# Altium PCB PCBFOC.PcbDoc
Units mm, origin at the board's own origin, x right, y up, seen from the top; angles counter-clockwise.
Board outline 65 x 70 mm, 4 copper layers (Top Layer, Layer 1, Layer 2, Bottom Layer), stack 0.603 mm thick; 46 components, 50 nets, 192 pads, 195 vias.
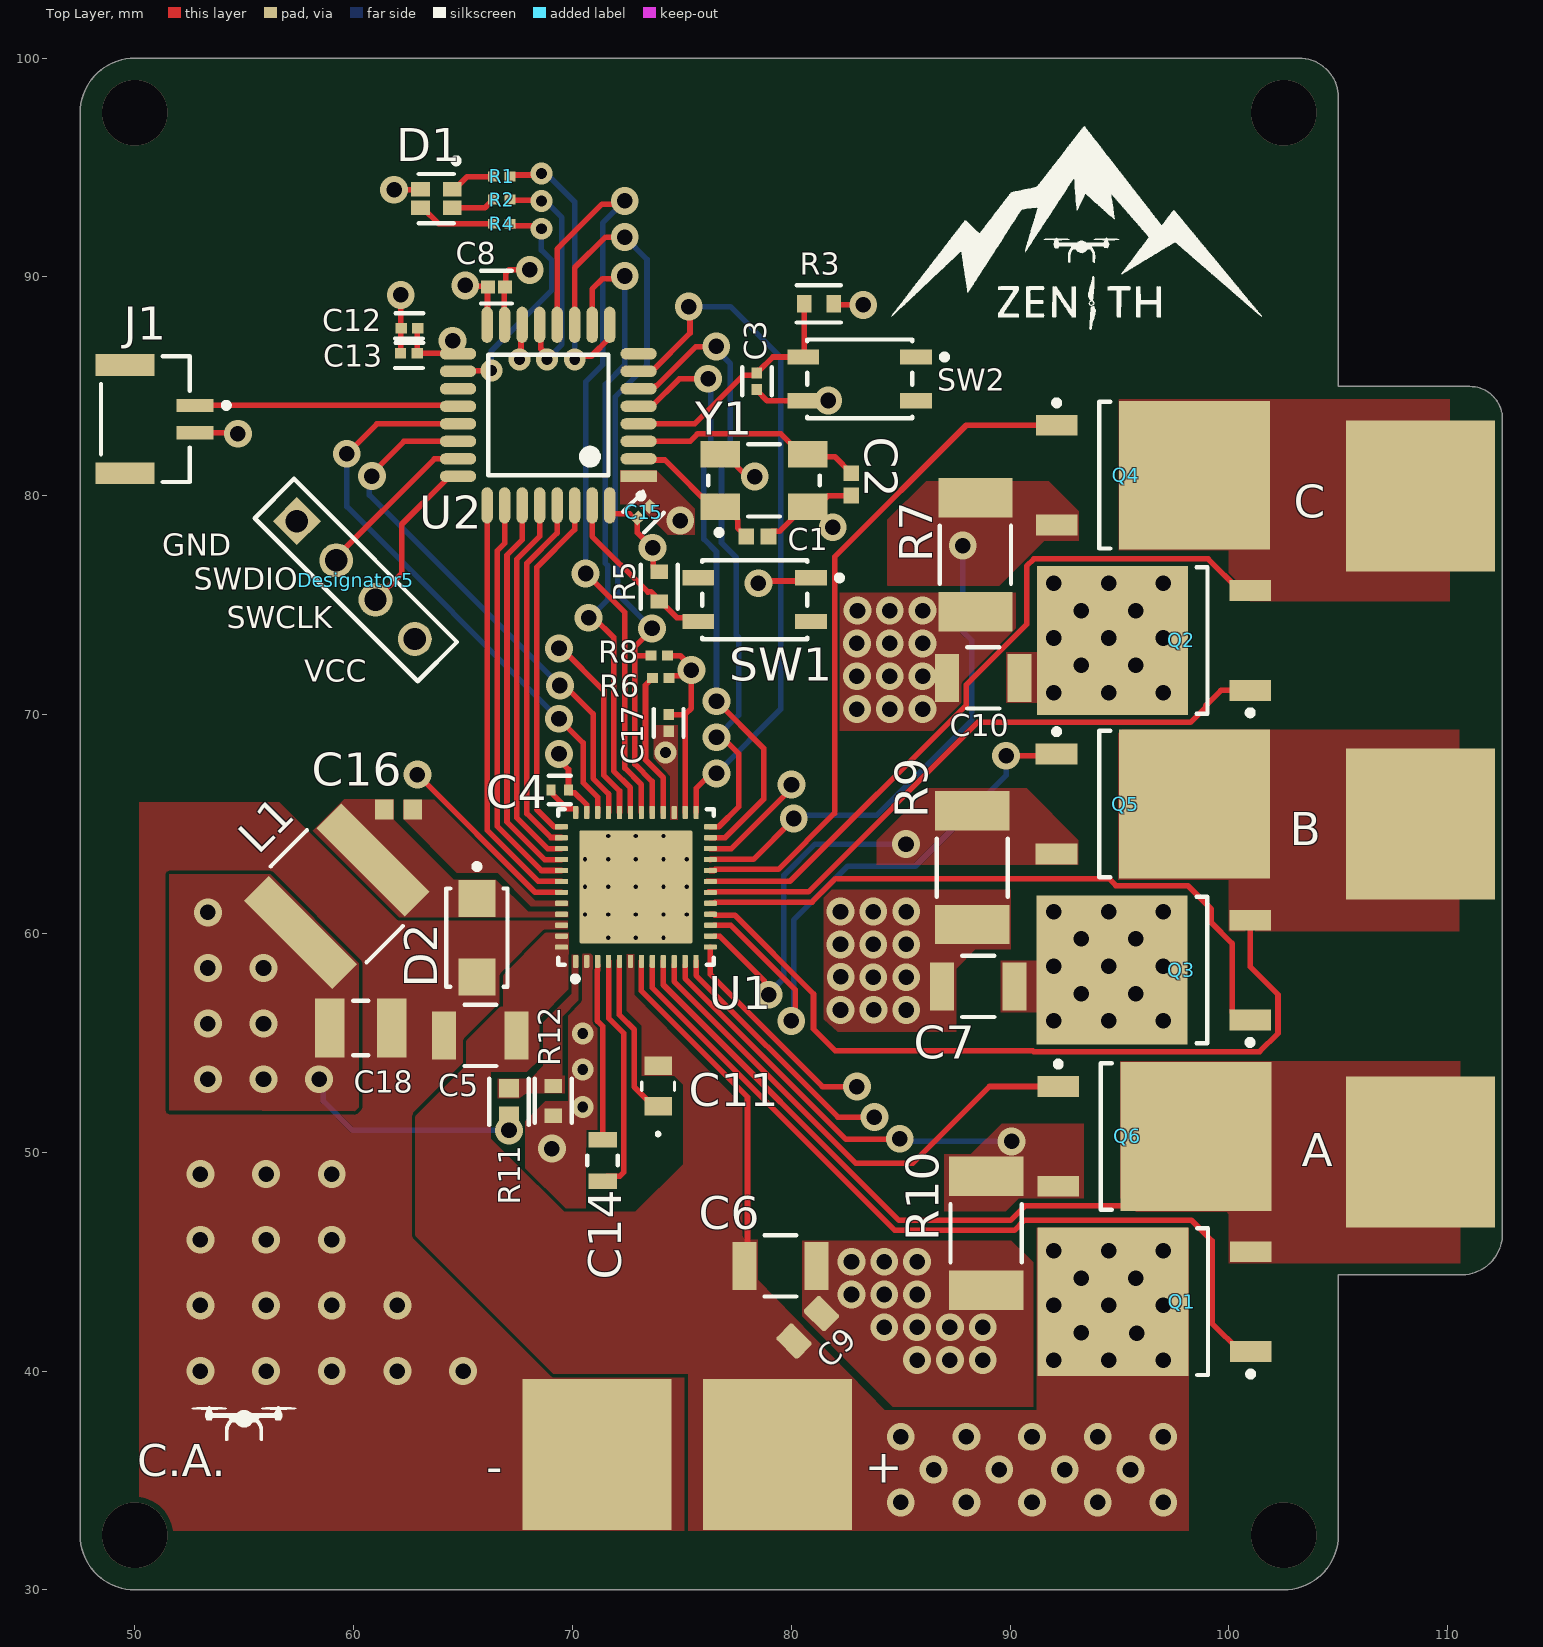
[diagram p0: Top Layer view]
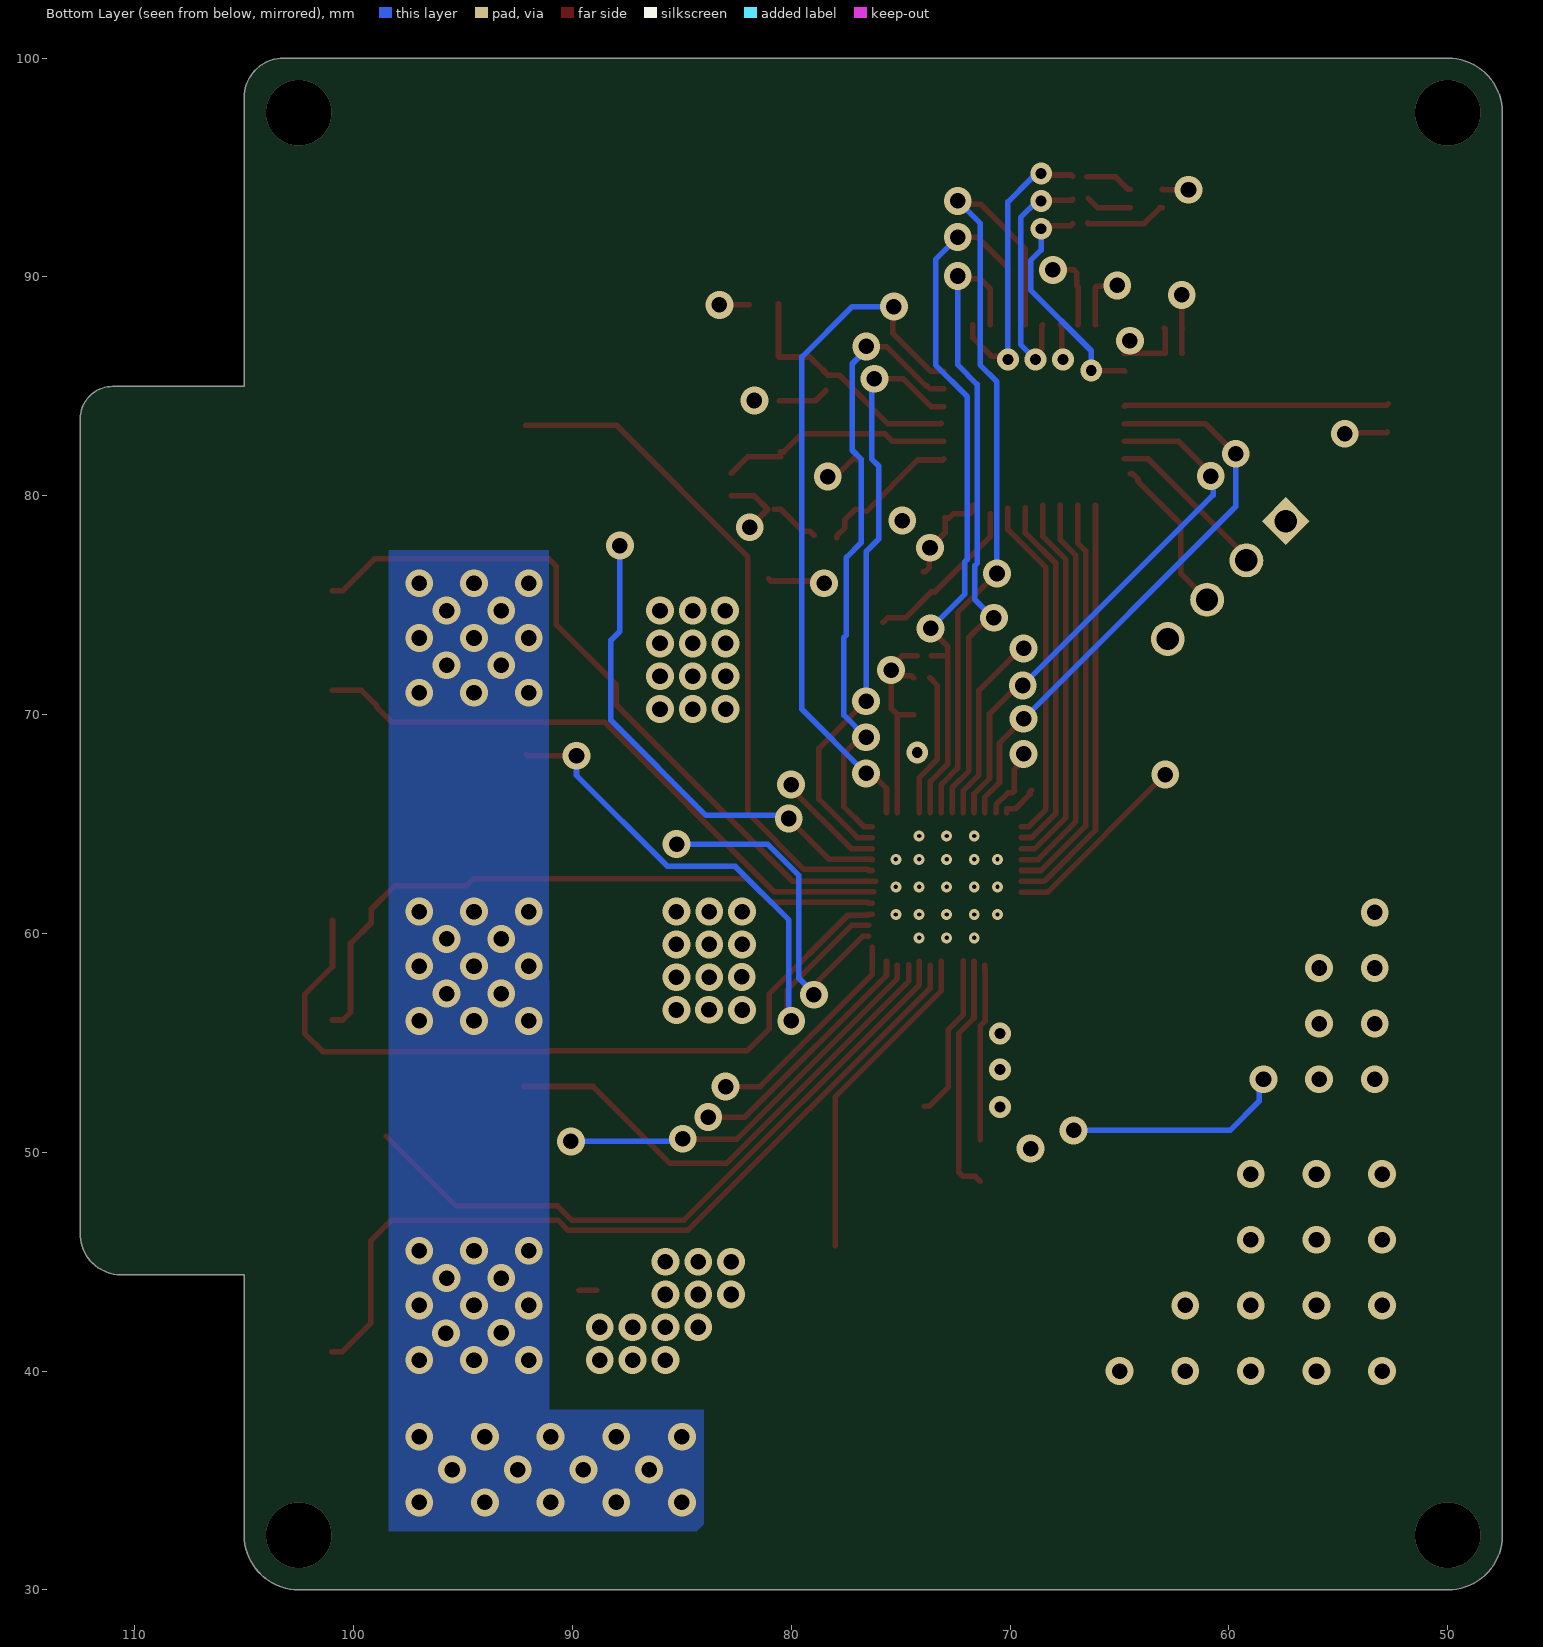
[diagram p1: Bottom Layer view, seen from below]
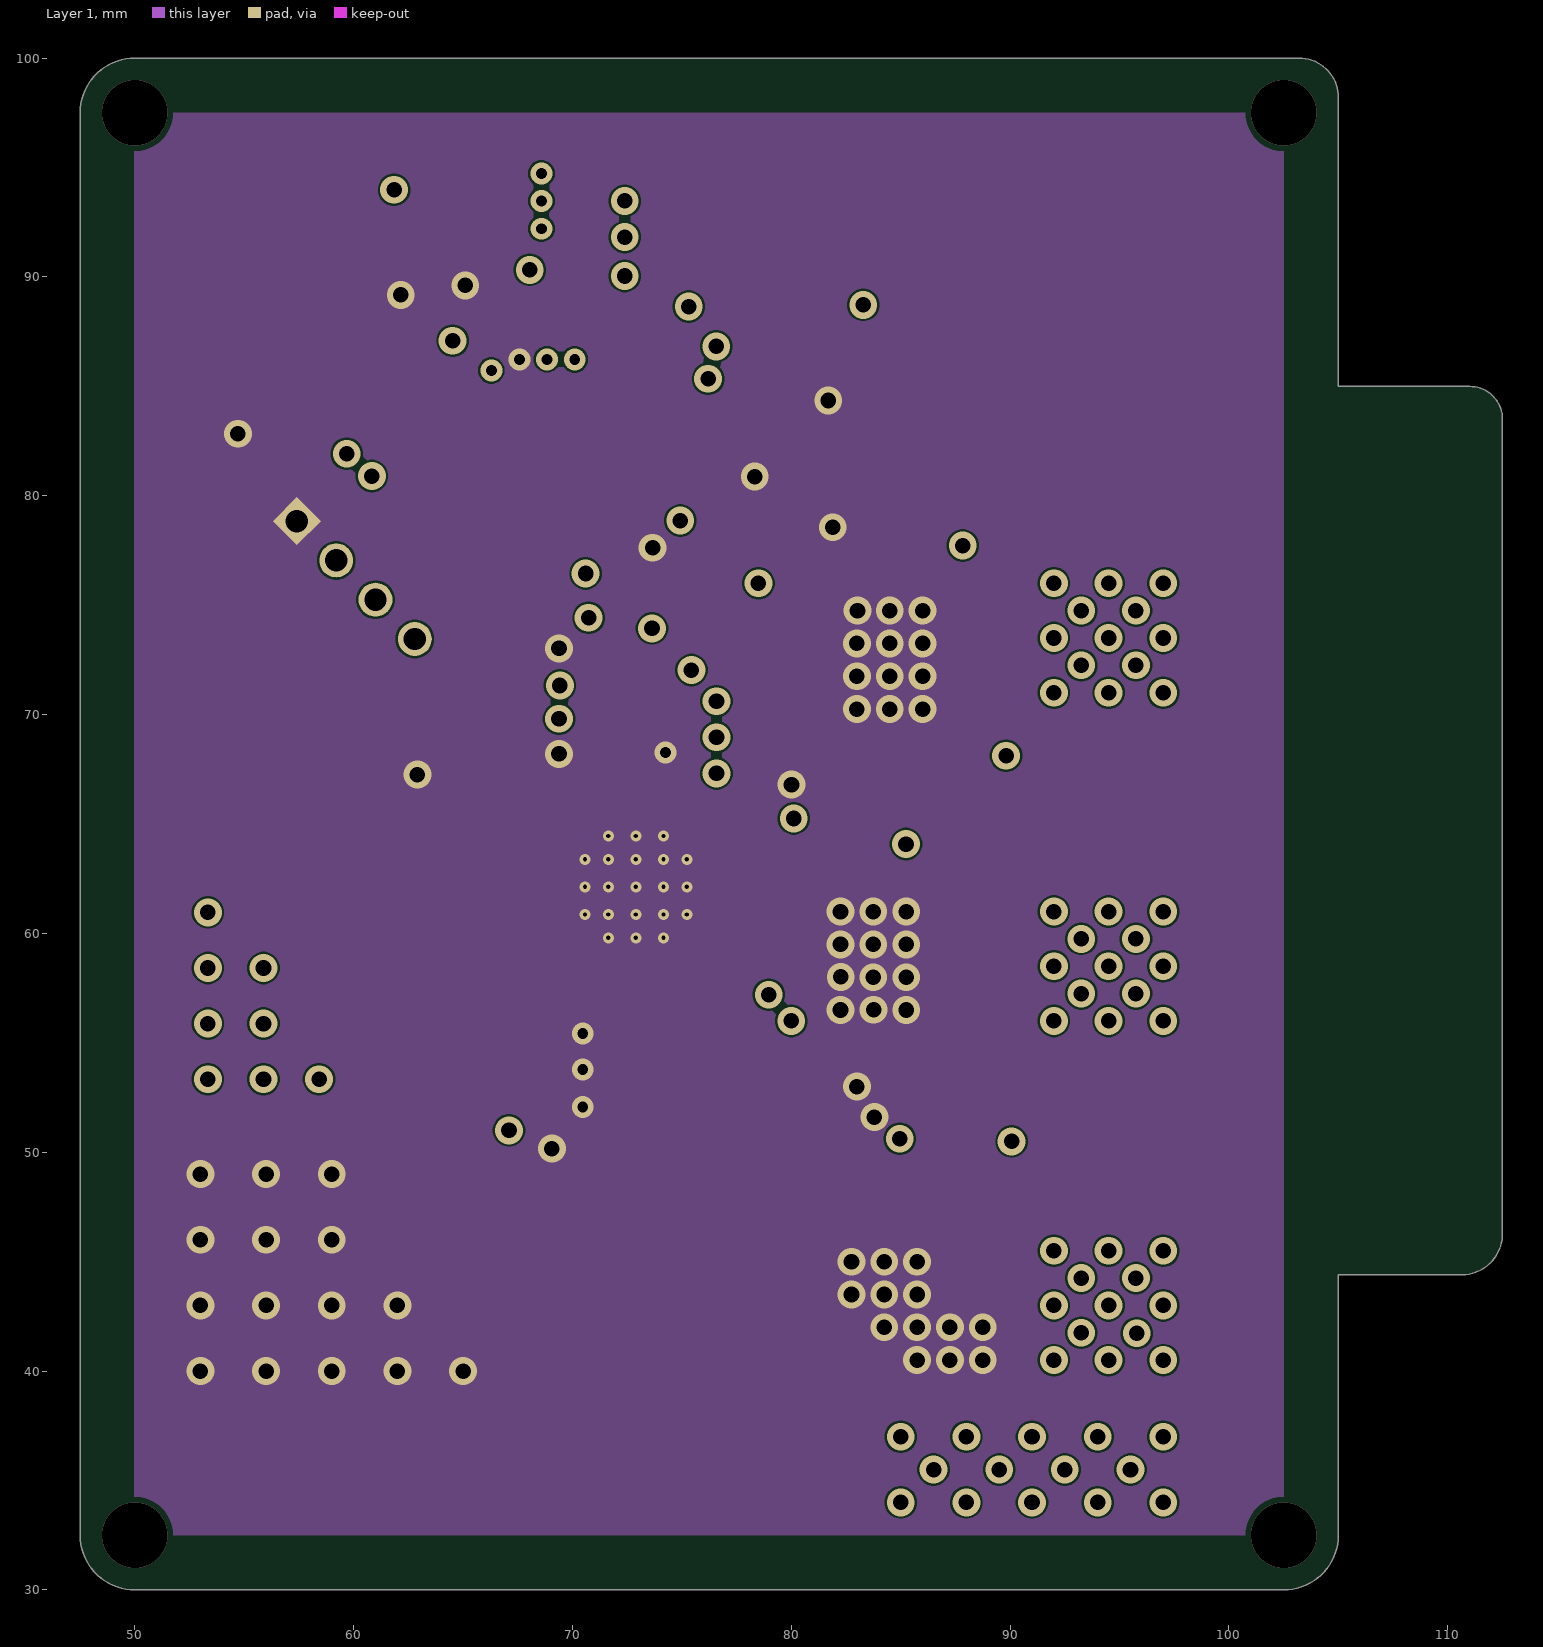
[diagram p2: Layer 1]
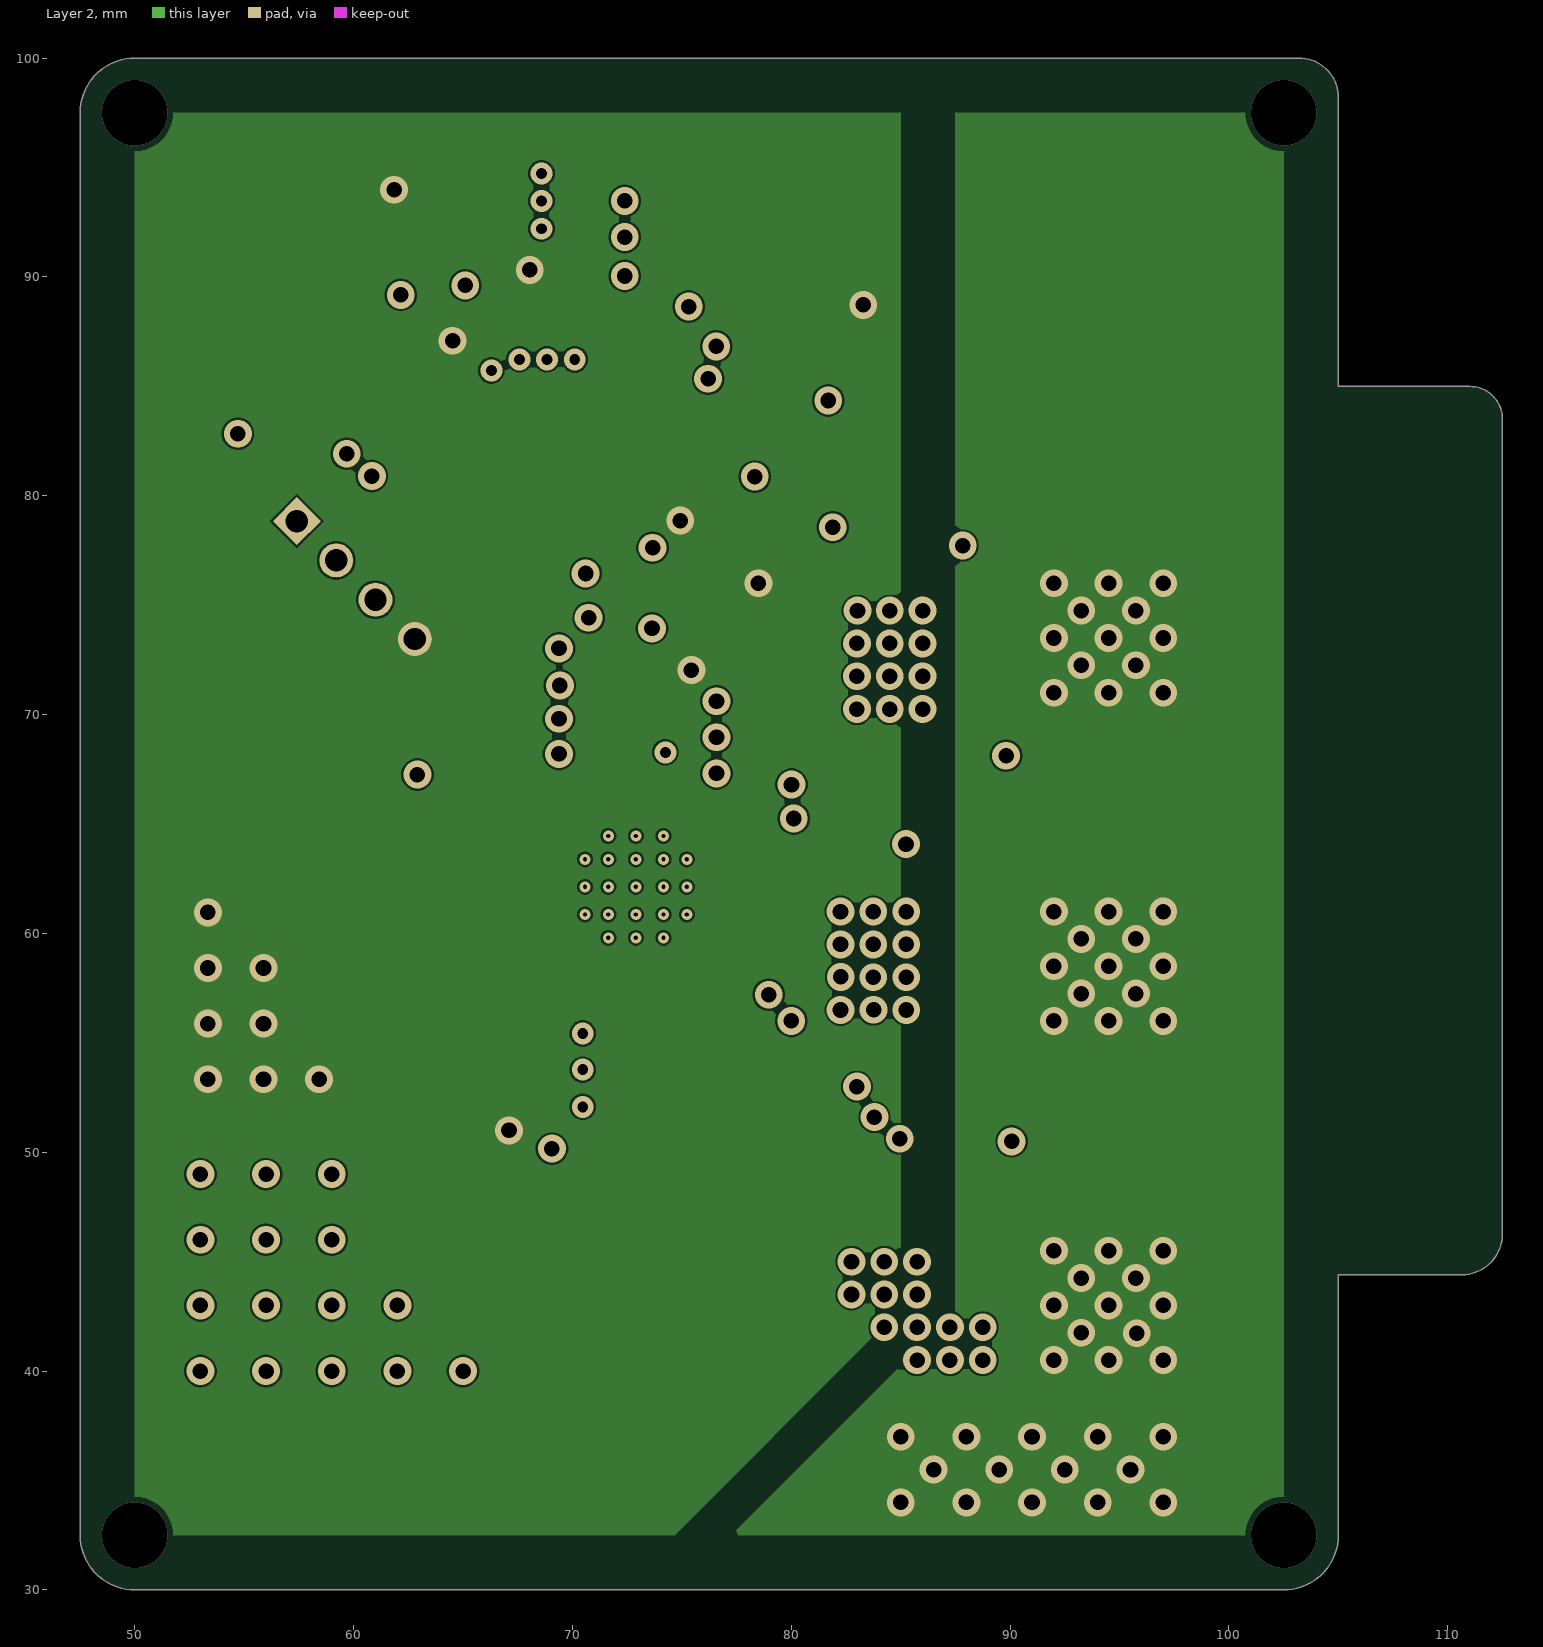
[diagram p3: Layer 2]
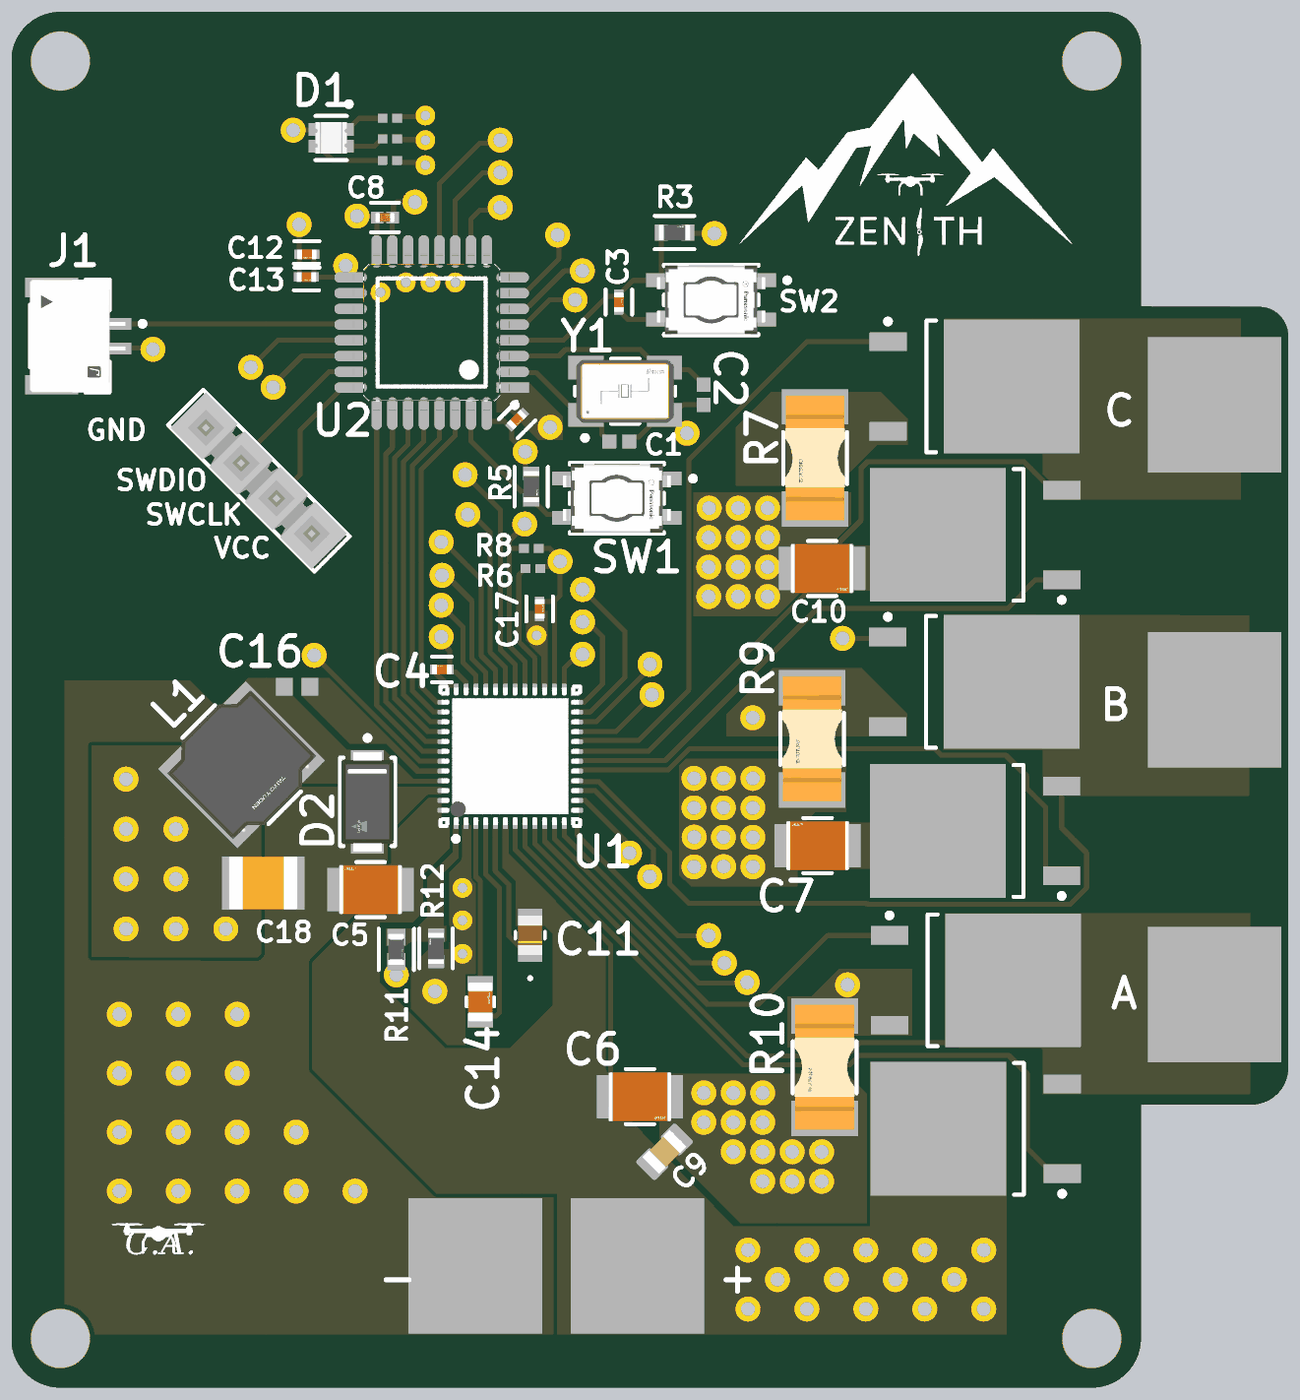
[diagram p4: 3D render of the assembled board from above, using the file's embedded part models]

## Layer stack, top to bottom
Top Solder: solder mask 0.0102, Solder Resist, Dk 3.5
Top Layer: signal copper 0.0356
Dielectric 2: prepreg 0.0711, PP-006, Dk 4.1
Layer 1: signal copper 0.035
Dielectric 1: dielectric 0.32, FR-4, Dk 4.8
Layer 2: signal copper 0.035
Dielectric 3: prepreg 0.0711, PP-006, Dk 4.1
Bottom Layer: signal copper 0.0356
Bottom Solder: solder mask 0.0102, Solder Resist, Dk 3.5

## Board outline
47.5,32.5 ccw(c50,32.5) 50,30 102.5,30 ccw(c102.5,32.5) 105,32.5 105,44.4 110.669,44.402 ccw(c110.629,46.271) 112.498,46.311 112.5,83.5 ccw(c111.005,83.5) 111.005,84.995 105,85.014 105,98.2 ccw(c103.2,98.2) 103.2,100 50,100 ccw(c50,97.5) 47.5,97.5

## Design rules (kind name [scope] priority, off if disabled: settings)
Clearance [All] p1: gap=0.254 ignorepadtopadclearanceinfootprint=FALSE except(0.1: Arc-Fill Arc-Poly Arc-Region Track-Fill Track-Poly Track-Region SMDPad-Fill SMDPad-Poly SMDPad-Region THPad-Fill THPad-Poly THPad-Region Via-Fill Via-Poly Via-Region; 0.15: Fill-Fill Fill-Poly Fill-Region Poly-Poly Poly-Region Region-Region; 0.2: Arc-Arc Arc-Track Arc-SMDPad Track-Track Track-SMDPad SMDPad-SMDPad)
ComponentClearance [All] p1: gap=0.05 collisioncheckmode=3 verticalgap=0.254 showdistances=FALSE
PolygonConnect [All] p1: connectstyle=Direct reliefconductorwidth=0.254 reliefentries=4 polygonreliefangle="90 Angle" airgapwidth=0.254
RoutingVias [All] p1: holewidth=0.711 width=1.27 viastyle="Through Hole" minholewidth=0.711 minwidth=1.27 maxholewidth=0.711 maxwidth=1.27
SolderMaskExpansion [All] p1: expansion=0 istentingtop=FALSE
SupplyNets "Schematic Supply Nets_1" [InNet('GND')] p1: voltage=0.000
SupplyNets "Schematic Supply Nets_2" [InNet('VCC')] p2: voltage=0.000
Width [All] p1: maxlimit=0.254 minlimit=0.254 preferedwidth=0.254
29 further rules are at their usual default settings.

## Components (designator, comment, footprint, x,y, rotation, side; value= is the part's Value field where it differs from the comment)
C1 "CC0402JRNPO9BN220" CAPC1005X55X25ML05T05 78.45,78.137 r180 top
C2 "CC0402JRNPO9BN220" CAPC1005X55X25ML05T05 82.744,80.517 r90 top
C3 "CL05B104KP5VPNC" FP-CL93-IPC_C 78.426,85.233 r90 top
C4 "GRM155R70J105KA12D" FP-GRM155-0_05-MFG 69.418,66.548 r180 top
C5 "C3225X7R1N106K250AC" FP-C3225-250-0_4-MFG 65.789,55.339 r180 top
C6 "C3225X7R1N106K250AC" FP-C3225-250-0_4-MFG 79.502,44.806 r0 top
C7 "C3225X7R1N106K250AC" FP-C3225-250-0_4-MFG 88.544,57.582 r180 top
C8 "GRM155R60J106ME05D" FP-GRM155-0_2-IPC_C 66.525,89.537 r0 top
C9 "CL21B104KCFNNNE" CAPC2012X135N 80.75,42 r225 top
C10 "C3225X7R1N106K250AC" FP-C3225-250-0_4-MFG 88.773,71.679 r0 top
C11 "CL21B105KBFNNNE" CAP_CL21_SAM 73.914,53.02 r90 top
C12 "CL05B104KP5VPNC" FP-CL93-IPC_C 62.55,87.662 r0 top
C13 "CL05B104KP5VPNC" FP-CL93-IPC_C 62.525,86.512 r0 top
C14 "GCM21BR72A473KA37L" FP-GCM21B-0_15-MFG 71.375,49.625 r90 top
C15 "CL05B104KP5VPNC" FP-CL93-IPC_C 73.25,79.25 r45 top
C16 "C0603C105K4RACTU" CAPC1608X90X35LL15T15 62.045,65.661 r0 top
C17 "CL05B104KP5NNNC" FP-CL17-IPC_C 74.397,69.621 r90 top
C18 "CL32B476MPJNNNE" CAPC3225X27N 60.325,55.677 r180 top
D1 "LTST-C19HE1WT" FP-LTST-C19HE1WT-MFG 63.782,93.581 r270 top
D2 "SS16HE3_B/I" FP-95400-MFG 65.634,59.805 r270 top
Designator5 "Comment" SMTC-TSW-104-08-X-S 57.408,78.842 r315 top
J1 "SM02B-GHS-TB(LF)(SN)" FP-SM02B-GHS-TB_LF_SN-MFG 50.481,83.505 r270 top
L1 "NRS6045T220MMGK" FP-NR6045-MFG 59.228,61.698 r225 top
Q1 "*" DPAK228P970X238-3N 96.593,43.17 r180 top
Q2 "MDDG10R08D" DPAK228P970X238-3N 96.568,73.387 r180 top
Q3 "MDDG10R08D" DPAK228P970X238-3N 96.565,58.324 r180 top
Q4 "MDDG10R08D" DPAK228P970X238-3N 96.528,80.941 r0 top
Q5 "MDDG10R08D" DPAK228P970X238-3N 96.52,65.913 r0 top
Q6 "MDDG10R08D" DPAK228P970X238-3N 96.6,50.724 r0 top
R1 "RC0402FR-07330RL" RESC1005X40X25LL05T10 66.775,94.591 r0 top
R2 "RC0402FR-07330RL" RESC1005X40X25LL05T10 66.775,93.537 r0 top
R3 "RC0603FR-0710KL" FP-RC0603-0_55-IPC_C 81.261,88.77 r0 top
R4 "RC0402FR-07330RL" RESC1005X40X25LL05T10 66.775,92.432 r0 top
R5 "RC0603FR-0710KL" FP-RC0603-0_55-IPC_C 73.965,75.844 r270 top
R6 "RC0402FR-0710KL" RESC1005X40X25LL05T10 74.041,71.679 r0 top
R7 "CSS2H-2512R-1L00F" FP-CSS2H-2512R-1L00F-MFG 88.417,77.301 r90 top
R8 "RC0402FR-0710KL" RESC1005X40X25LL05T10 73.971,72.695 r0 top
R9 "CSS2H-2512R-1L00F" FP-CSS2H-2512R-1L00F-MFG 88.268,63.008 r90 top
R10 "CSS2H-2512R-1L00F" FP-CSS2H-2512R-1L00F-MFG 88.9,46.3 r90 top
R11 "ERA-3AEB303V" FP-ERA3A-IPC_C 67.1,52.3 r270 top
R12 "RC0603FR-0710KL" FP-RC0603-0_55-IPC_C 69.125,52.35 r90 top
SW1 "EVQ-P2202M" FP-EVQ-P2202M-MFG 78.325,75.25 r270 top
SW2 "EVQ-P2202M" FP-EVQ-P2202M-MFG 83.125,85.341 r270 top
U1 "DRV8323RSRGZR" FP-RGZ0048A-MFG 72.9,62.125 r90 top
U2 "STM32G431KBT6" FP-LQFP32-5V-IPC_B 68.9,83.687 r180 top
Y1 "ABM3B-8.000MHZ-B2-T" FP-ABM3B-MFG 78.75,80.7 r0 top

## Footprints (in the part's own frame and the unit in brackets; to place one, negate y for a bottom-side part, rotate by r counter-clockwise, add the part's x,y. Pads: shape width x height; smd on the part's side, far side on the other; paste and mask are expansions set on the pad)
CAP_CL21_SAM [mm]
  rect 0.85x1.25 smd paste+0 mask+0: 1(-0.925,0) 2(0.925,0)
  silkscreen extent -2.26,-0.75 0.19,0.75, body extent -1,-0.63 1,0.63, height 1.35
CAPC1005X55X25ML05T05 [mm] "Chip Capacitor, 2-Leads, Body 1.00x0.50mm, IPC Low Density"
  rect 0.72x0.72 smd: 1(-0.51,0) 2(0.51,0)
  body extent -0.53,-0.28 0.53,0.27, height 0.55
CAPC1608X90X35LL15T15 [mm] "Chip Capacitor, 2-Leads, Body 1.60x0.81mm, IPC High Density"
  rect 0.85x0.9 smd: 1(-0.65,0) 2(0.65,0)
  body extent -0.88,-0.48 0.87,0.48, height 0.9
CAPC2012X135N [mm]
  rrect25% 1.05x1.38 smd: 1(-0.888,0) 2(0.888,0)
  body extent -1,-0.62 1,0.62, height 1.35
CAPC3225X27N [mm] "Chip Capacitor, 2-Leads, Body 3.20x2.50mm, IPC Medium Density"
  rect 1.35x2.7 smd: 1(-1.425,0) 2(1.425,0)
  silkscreen extent -0.35,-1.25 0.35,1.25, body extent -1.75,-1.35 1.75,1.35, height 2.7
DPAK228P970X238-3N [mm] "D-PAK, 3-Pads, Body 6.20x6.72mm (max), IPC Medium Density"
  rect 6.9x6.8 smd: D(1.9,0)
  rect 1.9x0.95 smd: G(-4.4,2.28) S(-4.4,-2.28)
  silkscreen extent -4.52,-3.35 -1.95,3.43, body extent -2.45,-3.35 3.75,3.35, height 2.38
FP-95400-MFG [mm]
  rect 1.7x1.68 smd paste+0 mask+0: 1(-1.79,0) 2(1.79,0)
  silkscreen extent -3.37,-1.4 2.25,1.4, body extent -2.74,-1.5 2.74,1.5, height 0.25
FP-ABM3B-MFG [mm]
  rect 1.8x1.2 smd paste+0 mask+0: 1(-2,-1.2) 2(2,-1.2) 3(2,1.2) 4(-2,1.2)
  silkscreen extent -2.55,-2.5 2.55,1.65, body extent -3,-1.9 3,1.9, height 0.25
FP-C3225-250-0_4-MFG [mm]
  rect 1.1x2.2 smd paste+0 mask+0: 1(-1.65,0) 2(1.65,0)
  silkscreen extent -0.72,-1.4 0.72,1.4, body extent -2.3,-1.5 2.3,1.5, height 0.25
FP-CL17-IPC_C [mm]
  rect 0.515x0.472 smd paste+0 mask+0: 1(-0.379,0) 2(0.379,0)
  silkscreen extent -0.64,-0.67 0.64,0.67, body extent -0.74,-0.38 0.74,0.38, height 0.25
FP-CL93-IPC_C [mm]
  rect 0.515x0.472 smd paste+0 mask+0: 1(-0.379,0) 2(0.379,0)
  silkscreen extent -0.64,-0.67 0.64,0.67, body extent -0.74,-0.38 0.74,0.38, height 0.25
FP-CSS2H-2512R-1L00F-MFG [mm]
  rect 1.8x3.4 smd paste+0 mask+0: 1(-2.6,0) 2(2.6,0)
  silkscreen extent -1.33,-1.63 1.33,1.63, body extent -3.6,-1.8 3.6,1.8, height 0.25
FP-ERA3A-IPC_C [mm]
  rect 0.855x0.906 smd paste+0 mask+0: 1(-0.626,0) 2(0.626,0)
  silkscreen extent -1.05,-0.9 1.05,0.9, body extent -1.15,-0.6 1.15,0.6, height 0.25
FP-EVQ-P2202M-MFG [mm]
  rect 0.7x1.45 smd paste+0 mask+0: 1(-1,2.575) 2(1,2.575) 3(-1,-2.575) 4(1,-2.575)
  silkscreen extent -1.8,-2.4 1.8,4, body extent -1.9,-3.4 1.9,3.4, height 0.25
FP-GCM21B-0_15-MFG [mm]
  rect 0.7x1.3 smd paste+0 mask+0: 1(-0.95,0) 2(0.95,0)
  silkscreen extent -0.23,-0.7 0.23,0.7, body extent -1.4,-0.8 1.4,0.8, height 0.25
FP-GRM155-0_2-IPC_C [mm]
  rect 0.628x0.606 smd paste+0 mask+0: 1(-0.389,0) 2(0.389,0)
  silkscreen extent -0.7,-0.75 0.7,0.75, body extent -0.8,-0.45 0.8,0.45, height 0.25
FP-GRM155-0_05-MFG [mm]
  rect 0.4x0.5 smd paste+0 mask+0: 1(-0.4,0) 2(0.4,0)
  silkscreen extent -0.5,-0.65 0.5,0.65, body extent -0.7,-0.38 0.7,0.38, height 0.25
FP-LQFP32-5V-IPC_B [mm]
  rect 1.655x0.526 smd paste+0 mask+0: 1(-4.125,2.8)
  rrect100% 1.655x0.526 smd paste+0 mask+0: 2(-4.125,2) 3(-4.125,1.2) 4(-4.125,0.4) 5(-4.125,-0.4) 6(-4.125,-1.2) 7(-4.125,-2) 8(-4.125,-2.8) 17(4.125,-2.8) 18(4.125,-2) 19(4.125,-1.2) 20(4.125,-0.4) 21(4.125,0.4) 22(4.125,1.2) 23(4.125,2) 24(4.125,2.8)
  rrect100% 0.526x1.655 smd paste+0 mask+0: 9(-2.8,-4.125) 10(-2,-4.125) 11(-1.2,-4.125) 12(-0.4,-4.125) 13(0.4,-4.125) 14(1.2,-4.125) 15(2,-4.125) 16(2.8,-4.125) 25(2.8,4.125) 26(2,4.125) 27(1.2,4.125) 28(0.4,4.125) 29(-0.4,4.125) 30(-1.2,4.125) 31(-2,4.125) 32(-2.8,4.125)
  silkscreen extent -4.35,-2.75 2.75,3.82, body extent -5.2,-5.2 5.2,5.2, height 0.25
FP-LTST-C19HE1WT-MFG [mm]
  rect 0.65x0.85 smd paste+0 mask+0: 1(-0.425,0.725) 2(0.425,0.725) 3(0.425,-0.725) 4(-0.425,-0.725)
  silkscreen extent -1.85,-0.8 1.12,1.03, body extent -0.95,-1.25 0.95,1.25, height 0.25
FP-NR6045-MFG [mm]
  rect 1.6x5.7 smd paste+0 mask+0: 1(-2.35,0) 2(2.35,0)
  silkscreen extent -1.17,-3.1 1.17,3.1, body extent -3.25,-3.2 3.25,3.2, height 0.25
FP-RC0603-0_55-IPC_C [mm]
  rect 0.659x0.812 smd paste+0 mask+0: 1(-0.677,0) 2(0.677,0)
  silkscreen extent -1.01,-0.85 1.01,0.85, body extent -1.11,-0.55 1.11,0.55, height 0.25
FP-RGZ0048A-MFG [mm]
  rrect42% 0.6x0.24 smd paste+0 mask+0: 1(-3.4,2.75) 2(-3.4,2.25) 3(-3.4,1.75) 4(-3.4,1.25) 5(-3.4,0.75) 6(-3.4,0.25) 7(-3.4,-0.25) 8(-3.4,-0.75) 9(-3.4,-1.25) 10(-3.4,-1.75) 11(-3.4,-2.25) 12(-3.4,-2.75) 25(3.4,-2.75) 26(3.4,-2.25) 27(3.4,-1.75) 28(3.4,-1.25) 29(3.4,-0.75) 30(3.4,-0.25) 31(3.4,0.25) 32(3.4,0.75) 33(3.4,1.25) 34(3.4,1.75) 35(3.4,2.25) 36(3.4,2.75)
  rrect42% 0.24x0.6 smd paste+0 mask+0: 13(-2.75,-3.4) 14(-2.25,-3.4) 15(-1.75,-3.4) 16(-1.25,-3.4) 17(-0.75,-3.4) 18(-0.25,-3.4) 19(0.25,-3.4) 20(0.75,-3.4) 21(1.25,-3.4) 22(1.75,-3.4) 23(2.25,-3.4) 24(2.75,-3.4) 37(2.75,3.4) 38(2.25,3.4) 39(1.75,3.4) 40(1.25,3.4) 41(0.75,3.4) 42(0.25,3.4) 43(-0.25,3.4) 44(-0.75,3.4) 45(-1.25,3.4) 46(-1.75,3.4) 47(-2.25,3.4) 48(-2.75,3.4)
  rrect2% 5.15x5.15 smd paste-1000 mask+0: 49(0,0)
  silkscreen extent -4.32,-3.55 3.55,3.55, body extent -3.8,-3.8 3.8,3.8, height 0.25
FP-SM02B-GHS-TB_LF_SN-MFG [mm]
  rect 0.6x1.7 smd paste+0 mask+0: 1(-0.625,2.275) 2(0.625,2.275)
  rect 1x2.7 smd paste+0 mask+0: 3(-2.475,-0.925) 4(2.475,-0.925)
  silkscreen extent -2.88,-2.02 2.88,3.83, body extent -3.08,-2.37 3.08,3.22, height 0.25
RESC1005X40X25LL05T10 [mm] "Chip Resistor, 2-Leads, Body 1.00x0.50mm, IPC High Density"
  rect 0.5x0.45 smd: 1(-0.375,0) 2(0.375,0)
  body extent -0.53,-0.27 0.53,0.28, height 0.4
SMTC-TSW-104-08-X-S [mm] ".025 SQ Post Terminal Strip Assembly, 1x4 Pins, Vertical, 2.54mm Pitch, Male"
  rect 1.55x1.55 hole 1.02: 1(0,0)
  round 1.55 hole 1.02: 2(2.54,0) 3(5.08,0) 4(7.62,0)
  silkscreen extent -1.46,-1.27 9.08,1.27, body extent -1.27,-1.27 8.89,1.27, height 8.38

## Part data
C1 C2: library part CMP-2100-03590-1, "Chip Capacitor, 22 pF, +/- 5%, 50 V, -55 to 125 degC, 0402 (1005 Metric), RoHS, Tape and Reel", Capacitance=22pF, Case Code (Imperial)=0402, Case Code (Metric)=1005, Dielectric=C0G, Dielectric Material=Ceramic, Insulation Resistance=100GR, Manufacturer=Yageo, Max Operating Temperature=125degC, Min Operating Temperature=-55degC, Package Description="2-Pin Surface Mount Device, Body 1 x 0.5 mm", Package Quantity=1, Temperature Coefficient=30ppm/degC, Tolerance=5%, Voltage Rating=50V, Case/Package=0402, Composition=Ceramic, Datasheet URL=http://www.yageo.com/NewPortal/yageodocoutput?fileName=/pdf/MLCC/UPY-GP_NP0_16V-to-50V_14.pdf, Datasheet Version="Rev. 14, 07/2016", Depth=0.5mm, Height=0.5mm, Lead Free=LeadFree, Length=1mm, Manufacturer URL=http://www.yageo.com/, Mount=SurfaceMount, Number of Pins=2, Package Reference=0402, Packaging=TapeandReel, Radiation Hardening=No, REACH SVHC=NoSVHC, RoHSCompliant=True, Termination=SMD/SMT, Thickness=0.022inch, Voltage Rating (DC)=50V, Width=0.02inch
C3 C12 C13 C15: library part CMP-13271-000610-1, "Cap Ceramic 100nF 10V X7R ±10% SMD 0402 +125°C Paper T/R"
C4: library part CMP-2008-04587-2, "Chip Multilayer Ceramic Capacitors for General Purpose, 0402, 1.0uF, X7R, 15%, 10%, 6.3V", Capacitance=1uF, Case Code (Imperial)=0402, Case Code (Metric)=1005, Dielectric=X7R, Max Operating Temperature=125°C, Min Operating Temperature=-55°C, Package Quantity=10000, Tolerance=10%, Voltage Rating=6.3V, Case/Package=0402, Depth=0.5mm, Height=0.5mm, Lead Free="Lead Free", Length=1mm, Material=Ceramic, Mount="Surface Mount", Packaging="Tape and Reel", Termination=SMD/SMT, Thickness=0.022inch, Voltage Rating (DC)=6.3V, Weight=0.000212oz, Width=0.5mm
C5 C6 C7 C10: library part CMP-08246-003742-1, "Multilayer Ceramic Capacitors 10uF ±10% 75V X7R SMD 1210", RoHS Compliant=Yes
C8: library part CMP-06035-044652-1, "Chip Multilayer Ceramic Capacitors for General Purpose, 0402, 10uF, X5R, 15%, 20%, 6.3V"
C9: "0.1 ÂµF Â±10% 100V Ceramic Capacitor X7R 0805 (2012 Metric)", Package="SMD-2 Samsung", Check_prices=https://www.snapeda.com/parts/CL21B104KCFNNNE/Samsung/view-part/?ref=eda, MF=Samsung, MP=CL21B104KCFNNNE, SnapEDA_Link=https://www.snapeda.com/parts/CL21B104KCFNNNE/Samsung/view-part/?ref=snap
C11: "Description", Manufacturer_Name=Samsung, Copyright="Copyright (C) 2025 Ultra Librarian. All rights reserved.", Manufacturer_Part_Number=CL21B105KBFNNNE
C14: library part CMP-2007-03365-2, "Ceramic Capacitor for Automotive 47nF ±10% 100VDC X7R 0805 Embossed T/R", Capacitance=47nF, Case Code (Imperial)=0805, Case Code (Metric)=2012, Dielectric=X7R, Max Operating Temperature=125°C, Min Operating Temperature=-55°C, Package Quantity=3000, Ratings=AEC-Q200, Tolerance=10%, Voltage Rating=100V, Case/Package=0805, Depth=1.25mm, Height=1.25mm, Lead Free="Lead Free", Length=2mm, Mount="Surface Mount", Packaging="Tape and Reel", Radiation Hardening=No, Termination=SMD/SMT, Thickness=0.055inch, Voltage Rating (DC)=100V, Width=0.049inch
C16: library part CMP-2006-02298-2, Manufacturer=Kemet, Part Number=C0603C105K4RACTU
C17: library part CMP-13271-001069-1, "Cap Ceramic 100nF 10V X7R ±10% SMD 0402 +125°C Paper T/R", Capacitance=100nF, Case Code (Imperial)=0402, Case Code (Metric)=1005, Dielectric=X7R, Max Operating Temperature=125°C, Min Operating Temperature=-55°C, Package Quantity=1, Tolerance=10%, Voltage Rating=10V, Case/Package=0402, Contact Plating=Tin, Depth=0.5mm, Height=0.5mm, Length=1mm, Mount="Surface Mount", Packaging="Tape and Reel", Radiation Hardening=No, Thickness=0.022inch, Width=0.02inch
D1: library part CMP-2000-05201-2, "LED RGB DIFFUSED CHIP SMD", Case Code (Imperial)=0606, Case Code (Metric)=1616, Color=Blue, Forward Current=20mA, Forward Voltage=3.35V, Lens Color=White, Max Operating Temperature=80°C, Min Operating Temperature=-20°C, Package Quantity=3000, Reverse Voltage=5V, Case/Package=0606, Depth=1.6mm, Dominant Wavelength=470nm, Height=0.35mm, Lead Free="Lead Free", Length=1.6mm, Lens Style=Diffused, Lens Transparency=Diffused, Luminous Intensity=180mcd, Mount="Surface Mount", Number of Elements=3, Number of LEDs=3, Number of Pins=4, Packaging="Tape and Reel", Radiation Hardening=No, Test Current=20mA, Viewing Angle=130°, Width=1.6mm
D2: library part CMP-02539-000060-1, "DIODE SCHOTTKY 60V 1A DO214AC", RoHS Compliant=Yes
J1: library part CMP-2000-07076-2, "CONN HEADER SMD R/A 2POS 1.25MM", Color=Natural, Current Rating=1A, Package Quantity=2500, Voltage Rating=50V, Connector Type="Outer Shroud Contact", Contact Material=Bronze, Contact Plating=Tin, Contact Type="Male Pin", Fastening Type=Latch, Housing Color=Natural, Housing Material=Nylon, Lead Free="Lead Free", Mount="Surface Mount", Number of Contacts=2, Number of Positions=2, Number of Rows=1, Orientation="Right Angle", Packaging="Tape and Reel", Pitch=0.049inch, Series=GH, Termination=Solder
L1: library part CMP-14484-001341-1, "Shielded Wirewound Inductor 22uH 20% 1.9A 0.1391Ω SMD", Case/Package=Nonstandard, Current Rating=1.6A, DC Resistance (DCR)=139.1mR, Inductance=22uH, Inductance Tolerance=20%, Max DC Current=2A, Max Operating Temperature=125°C, Min Operating Temperature=-25°C, Package Quantity=1500, Resistor Type=Wirewound, Self Resonant Frequency=7MHz, Test Frequency=100kHz, Core Material=Ferrite, Depth=6.2mm, Halogen Free="Halogen Free", Height=4.5mm, Height - Seated (Max)=0.177inch, Lead Free="Lead Free", Lead Pitch=4.7mm, Length=6mm, Mount="Surface Mount", Number of Pins=2, Packaging="Tape and Reel", Radiation Hardening=No, RMS Current (Irms)=1.6A, RoHS Compliant=Yes, Saturation Current=2A, Series=NRS, Shielding=Shielded, Termination=SMD/SMT, Tolerance=20%, Width=0.236inch
Q1: library part MDDG10R08D
R1 R2 R4: library part CMP-2002-07613-1, Manufacturer="Yageo / Phycomp", Part Number=RC0402FR-07330RL
R3 R5 R12: library part CMP-2100-03664-2, "RES 10K OHM 1% 1/10W 0603", Case Code (Imperial)=0603, Case Code (Metric)=1608, Max Operating Temperature=155°C, Max Power Dissipation=100mW, Min Operating Temperature=-55°C, Resistance=10kR, Resistance Tolerance=1%, Resistor Type="Thick Film", Temperature Coefficient=100ppm/°C, Voltage Rating=75V, Voltage Rating (DC)=50V, Case/Package=0603, Construction=Rectangular, Depth=0.8mm, Features="Moisture Resistant", Height=0.45mm, Lead Free="Lead Free", Lead Pitch=0.3mm, Length=1.6mm, Military Standard=Not, Number of Pins=2, Number of Terminations=2, Packaging="Tape and Reel", Power Rating=100mW, RoHS Compliant=Yes, Series=RC, Size Code=0603, Termination=SMD/SMT, Tolerance=1%, Weight=7.1E-05oz, Width=0.8mm
R6 R8: library part CMP-2002-07353-1, Manufacturer="Yageo / Phycomp", Part Number=RC0402FR-0710KL
R7 R9 R10: library part CMP-07231-006695-1, "RES 0.001 OHM 1% 5W 2512", Case Code (Imperial)=2512, Case Code (Metric)=6432, Max Operating Temperature=170°C, Max Power Dissipation=5W, Min Operating Temperature=-55°C, Resistance=1mR, Resistor Type="Metal Element", Temperature Coefficient=50ppm/°C, Tolerance=1%, Case/Package=2512, Features="Moisture Resistant", Height=0.02inch, Length=0.25inch, Number of Terminations=2, Packaging="Cut Tape", Power Rating=5W, REACH SVHC="No SVHC", RoHS Compliant=Yes, Width=0.12inch
R11: library part CMP-2000-00027-2, "RES SMD 30K OHM 0.1% 1/10W 0603", Case Code (Imperial)=0603, Case Code (Metric)=1608, Max Operating Temperature=155°C, Max Power Dissipation=100mW, Min Operating Temperature=-55°C, Package Quantity=1, Resistance=30kR, Resistance Tolerance=0.1%, Resistor Type="Thin Film", Temperature Coefficient=25ppm/°C, Voltage Rating=75V, Case/Package=0603, Construction=Rectangular, Contact Plating=Tin, Depth=0.8mm, Features="Automotive AEC-Q200", Height=0.45mm, Length=1.6mm, Military Standard=Not, Mount="Surface Mount", Number of Pins=2, Number of Terminations=2, Packaging="Tape and Reel", Power Rating=100mW, Radiation Hardening=No, REACH SVHC="No SVHC", RoHS Compliant=Yes, Series=ERA-3A, Size Code=0603, Technology="THIN FILM", Termination=SMD/SMT, Tolerance=0.1%, Width=0.8mm
SW1 SW2: library part CMP-05618-000029-1, "SWITCH TACTILE SPST-NO 0.02A 15V", Actuator Color=Natural, Contact Current Rating=20mA, Contact Resistance=100mR, Max Operating Temperature=85°C, Max Voltage Rating (DC)=15V, Min Operating Temperature=-40°C, Operating Force=1.6N, Package Quantity=1, Actuator Length=0.45mm, Color=Natural, Contact Plating=Gold, Current Rating=20mA, Depth=5.5mm, Electrical Life=1000000Cycles, Height=2.1mm, Illumination Type=Non-Illuminated, Lead Free="Lead Free", Length=3.5mm, Max Current Rating=20mA, Mechanical Life=1000000Cycles, Mount="Surface Mount", Orientation=Straight, Packaging="Tape and Reel", Radiation Hardening=No, REACH SVHC="No SVHC", Series=EVQP2, Size=3.5mm, Switch Function=Off-Mom, Switch Travel=0.25mm, Termination=J-Bend, Throw Configuration=SPST, Voltage Rating (DC)=15V
U1: library part CMP-04915-000002-1, "IC MTR DRV MULTIPHAS 6-60V 48QFN", Ambient Temperature Range High=+125°C, Ambient Temperature Range Low=-40°C, Manufacturer="Texas Instruments", Max Junction Temp=+150°C, Max Supply Voltage=60V, Min Supply Voltage=4V, Nominal Supply Current=10.5mA, Output Current=5mA, Package=RGZ0048A, Switching Frequency=700kHz, Temperature="-40°C to +125°C", Automotive=No, Category=IC, ComponentLink2Description=Datasheet, ComponentLink2URL=http://www.ti.com/lit/ds/symlink/drv8323r.pdf, Device Class L1="Integrated Circuits (ICs)", Device Class L2="Power Management ICs", Device Class L3="Motor Drivers", Digikey Description="IC MTR DRV MULTIPHAS 6-60V 48QFN", Height=1mm, Lead Free=Yes, Manufacturer Part Number=DRV8323RSRGZR, Motor Type="Brushless DC", Mouser Description="Triple Half Bridge Motor Driver 48-Pin VQFN EP T/R", Octopart=https://octopart.com/drv8323rsrgzr-texas+instruments-80665177, RoHS=TRUE, Standoff Height=0mm, Temperature Range High=+125°C, Temperature Range Low=-40°C
U2: library part CMP-12105-000140-1, "IC MCU 32BIT 128KB FLASH 32LQFP"
Y1: library part CMP-1688-00002-2, "Crystal 8MHz ±20ppm 18pF SMD-4 5mm x 3.2mm", Case/Package=CSMD, ESR (Equivalent Series Resistance)=200R, Frequency=8MHz, Frequency Stability=50ppm, Frequency Tolerance=20ppm, Load Capacitance=18pF, Max Operating Temperature=70°C, Min Operating Temperature=-20°C, Operating Frequency="8 MHz", Package Quantity=1000, Resistor Type=Ceramic, Depth=3.2mm, Height=0.043inch, Lead Free="Lead Free", Length=5mm, Mount="Surface Mount", Number of Pins=4, Packaging="Tape and Reel", Series=ABM3B, Series Resistance=200R, Termination=SMD/SMT, Tolerance=20ppm, Width=0.126inch
C18: Supplier 1="Future Electronics", Supplier Part Number 1=CL32B476MPJNNNE

## Free pads (board coordinates)
  rect 6.8x6.9 smd: 3(108.75,80) 4(108.75,65) 5(108.75,50) 6(71.12,36.195) 7(79.375,36.195)

## Via types
v1: diameter 1.27, hole 0.711, Top Layer to Bottom Layer, 159 vias
v2: diameter 0.5, hole 0.2, Top Layer to Bottom Layer, 21 vias
v3: diameter 1, hole 0.5, Top Layer to Bottom Layer, 11 vias
v4: diameter 3, hole 3, Top Layer to Bottom Layer, 4 vias

## Nets (pads, with @x,y where several pads share a name; then routed paths per layer and width w, separated by ;. In a path a pad name is that pad's centre, name@x,y a point inside that pad or via, vN(x,y) a via of type N, cw(c..) or ccw(c..) an arc to the next point about the centre after c; other vN are vias at no path point)
A: pad.5 Q1.S Q6.D U1.9 | length 31.5
  Top Layer w0.254: U1.9 74.15,57.656 84.922,46.884 90.012,46.884 90.676,47.549 95.325,47.549 Q6.D
B: pad.4 Q3.S Q5.D U1.16 | length 35.5
  Top Layer w0.254: U1.16 76.466,60.875 76.512,60.829 77.419,60.829 81.016,57.232 81.016,55.636 82.017,54.635 91.042,54.635 91.08,54.597 101.405,54.597 102.242,55.434 102.242,57.207 100.965,58.484 Q3.S
Blue: R4.2 U2.18 | length 10.9
  Top Layer w0.254: U2.18 64.793,85.706 66.275,85.706 v3(66.294,85.725) ; R4.2 67.248,92.334 68.448,92.334 v3(68.58,92.202)
  Bottom Layer w0.254: v3(66.294,85.725) 66.294,86.625 69.063,89.394 69.063,90.743 68.58,91.226 v3(68.58,92.202)
BOOT: R5.2 SW1.4 U2.31 | length 7.6
  Top Layer w0.254: U2.31@70.9,79.187 70.9,78.145 73.443,75.602 ; 73.457,75.616 73.582,75.616 74.765,74.432 75.586,74.432 SW1.4@75.809,74.209
C: pad.3 Q2.S Q4.D U1.19 | length 33.6
  Top Layer w0.254: U1.19@76.149,62.382 79.939,62.382 88,70.443 88,71.368 90.75,74.118 90.75,76.781 91.083,77.114 99.046,77.114 100.493,75.667 Q2.S
"Current Read A": U1.23 U2.5 | length 27.4
  Top Layer w0.254: U2.5@73.025,84.074 73.611,84.074 74.881,85.344 v1(76.2,85.344) ; U1.23 76.981,64.375 78.74,66.134 78.74,68.453 v1(76.581,70.612)
  Bottom Layer w0.254: v1(76.2,85.344) 76.327,85.217 76.327,81.679 76.002,81.354 76.002,78.019 76.581,77.44 v1(76.581,70.612)
"Current Read B": U1.24 U2.6 | length 28.8
  Top Layer w0.254: U2.6 73.663,84.887 73.799,85.023 73.847,85.023 75.642,86.818 v1@76.531,86.818 ; U1.24 76.686,64.875 77.597,65.786 77.597,68.22 76.856,68.961 v1(76.581,68.961)
  Bottom Layer w0.254: v1(76.571,86.822) 76.571,86.676 77.216,86.031 77.216,82.081 76.81,81.675 76.81,77.854 77.484,77.179 77.484,73.635 77.597,73.522 77.597,69.977 v1(76.581,68.961)
"Current Read C": U1.25 U2.7 | length 32
  Top Layer w0.254: U2.7 73.624,85.687 75.371,87.434 75.371,88.586 v1(75.311,88.646) ; U1.25 75.65,66.625 76.335,67.31 v1(76.581,67.31)
  Bottom Layer w0.254: v1(75.311,88.646) 77.216,88.646 79.516,86.346 79.516,70.245 v1(76.581,67.31)
"Current read calibration": U1.34 U2.21 | length 26.8
  Top Layer w0.254: v1(59.69,81.915) 61.062,83.287 U2.21 ; v1(69.386,69.806) 70.485,68.707 70.485,66.894 71.15,66.229 U1.34
  Bottom Layer w0.254: v1(59.69,81.915) 59.69,79.502 v1(69.386,69.806)
DVDD: C4.2 U1.36 | length 1.7
  Top Layer w0.254: C4.2@69.012,66.548 69.091,66.469 69.091,66.363 69.756,65.698 70.143,65.698 70.15,65.691 U1.36
Enable: U1.33 U2.22 | length 24.8
  Top Layer w0.254: v1(60.833,80.899) 60.833,81.026 62.294,82.487 U2.22 ; v1(69.425,71.33) 69.64,71.33 70.942,70.028 70.942,67.079 71.65,66.371 U1.33
  Bottom Layer w0.254: v1(60.833,80.899) 60.706,80.772 60.723,80.755 60.723,80.032 v1(69.425,71.33)
"fc communication": J1.1 U2.20 | length 12.1
  Top Layer w0.254: J1.1@52.73,84.201 52.805,84.126 64.735,84.126 U2.20
GHA: Q1.G U1.8 | length 37.9
  Top Layer w0.254: U1.8@73.65,58.552 73.65,57.514 84.734,46.43 90.2,46.43 90.666,46.897 98.278,46.897 99.224,45.951 99.224,42.183 100.518,40.89 Q1.G
GHB: Q3.G U1.17 | length 30
  Top Layer w0.254: U1.17 76.466,61.375 76.519,61.428 80.948,61.428 82.02,62.5 94.521,62.5 94.835,62.186 98.116,62.186 99.196,61.106 99.196,60.486 100.142,59.54 100.142,56.392 100.49,56.044 Q3.G
GHC: Q2.G U1.18 | length 28.6
  Top Layer w0.254: U1.18@76.225,61.9 80.778,61.9 88.518,69.64 98.234,69.64 98.946,70.351 98.946,70.415 99.637,71.107 Q2.G
GLA: Q6.G U1.10 | length 23.2
  Top Layer w0.254: U1.10@74.642,58.575 74.642,57.806 82.943,49.505 85.559,49.505 89.058,53.004 Q6.G
GLB: Q5.G U1.15 | length 26.8
  Top Layer w0.254: U1.15@76.473,60.375 77.231,60.375 80.188,57.418 80.188,56.889 80.178,56.879 80.178,56.178 v1(80,56) ; v1(89.814,68.123) 92.05,68.123 Q5.G
  Bottom Layer w0.254: v1(80,56) 80.108,56.108 80.108,60.608 82.568,63.068 85.663,63.068 89.814,67.219 v1(89.814,68.123)
GLC: Q4.G U1.20 | length 31.1
  Top Layer w0.254: U1.20 76.466,62.875 76.519,62.928 79.413,62.928 81.984,65.499 81.984,77.209 87.996,83.221 Q4.G
GND: C1.1 C2.1 C3.1 C4.1 C5.2 C6.2 C7.2 C8.1 C9.1 C10.1 C12.1 C13.1 C15.1 C17.1 C18.1 D2.2 Designator5.1 J1.2 pad.6 R5.1 R7.1 R9.1 R10.1 R12.1 SW2.4 U1.2 U1.12 U1.13 U1.22 U1.27 U1.32 U1.35 U1.43 U1.46 U1.49 U2.14 U2.16 U2.32 Y1.2 Y1.4 | length 71.4
  Top Layer w0.254: J1.2@52.77,82.916 52.801,82.885 54.656,82.885 v1(54.712,82.829) ; C12.1@62.128,87.655 62.162,87.689 62.162,89.12 62.154,89.129 v1(62.154,89.179) ; C13.1 62.158,86.525 C12.1@62.158,87.662 ; v1(62.916,67.259) 68.3,61.875 U1.43 ; v1(65.1,89.611) 65.137,89.574 66.055,89.574 66.118,89.512 66.118,87.83 U2.16 ; v3(67.58,86.233) 67.648,86.301 67.648,87.76 U2.14 ; v1(69.386,68.201) 69.386,67.926 69.818,67.494 C4.1 ; v1(69.386,73.025) 69.509,73.025 71.428,71.106 71.428,67.235 72.15,66.513 U1.32 ; C4.1@69.799,66.517 69.891,66.425 70.103,66.425 70.643,65.885 70.643,65.532 U1.35 ; U2.32 71.7,79.297 71.825,79.172 72.608,79.172 72.813,78.967 72.828,78.982 C15.1 ; C15.1@72.967,78.967 72.967,78.311 73.656,77.622 v1(73.66,77.622) 73.686,77.597 73.686,76.723 73.888,76.521 R5.1 ; U1.12 75.65,58.082 82.127,51.605 v1(83.8,51.605) ; U1.13 76.3,58.127 81.427,53 v1(83,53) ; U1.22 77.261,63.875 80.01,66.624 v1(80.01,66.802) ; Y1.4@76.987,81.636 77.102,81.75 77.109,81.75 77.791,81.068 78.139,81.068 v1(78.334,80.874) ; C3.1@78.426,84.811 78.896,84.341 SW2.4 ; C1.1@78.95,78.187 79.133,78.37 79.46,78.37 80.475,79.385 Y1.2@80.775,79.385 ; v1(81.899,78.56) 81.075,79.385 81.697,80.007 C2.1 ; R10.1 R10.1@89.7,43.7
  Bottom Layer w0.254: v1(83.8,51.605) v1@83.82,51.584
  other v1: 53,40 56,40 59,40 62,40 65,40 85.75,40.5 87.25,40.5 88.75,40.5 84.25,42 85.75,42 87.25,42 88.75,42 53,43 56,43 59,43 62,43 82.75,43.5 84.25,43.5 85.75,43.5 82.75,45 84.25,45 85.75,45 53,46 56,46 59,46 53,49 56,49 59,49 69.063,50.165 82.25,56.5 85.25,56.5 83.762,56.512 83.75,58 85.25,58 82.262,58.012 82.25,59.5 83.75,59.5 85.25,59.5 82.25,61 83.75,61 85.25,61 83,70.25 84.5,70.25 86,70.25 83,71.75 84.5,71.75 86,71.75 83,73.25 84.5,73.25 86,73.25 83.026,74.751 84.5,74.75 86,74.75 81.686,84.353
  other v2: 71.64,59.8 72.9,59.8 74.16,59.8 70.575,60.865 71.64,60.865 72.9,60.865 74.16,60.865 75.225,60.865 70.575,62.125 71.64,62.125 72.9,62.125 74.16,62.125 75.225,62.125 70.575,63.385 71.64,63.385 72.9,63.385 74.16,63.385 75.225,63.385 71.64,64.45 72.9,64.45 74.16,64.45
  other v3: 70.469,52.075 70.469,53.775 70.469,55.425 74.244,68.275
Green: R2.2 U2.13 | length 11.2
  Top Layer w0.254: R2.2 67.182,93.505 68.547,93.505 v3(68.58,93.472) ; U2.13 68.552,87.76 68.552,86.717 68.834,86.435 v3(68.834,86.233)
  Bottom Layer w0.254: v3(68.58,93.472) 68.759,93.472 69.517,92.714 69.517,86.916 v3(68.834,86.233)
INHA: U1.37 U2.30 | length 15.9
  Top Layer w0.254: U1.37 69.161,64.875 68.37,65.666 68.37,76.726 70.1,78.456 U2.30@70.1,79.421
INHB: U1.39 U2.28 | length 17.3
  Top Layer w0.254: U2.28 68.5,78.14 67.462,77.102 67.462,65.282 68.868,63.875 U1.39
INHC: U1.41 U2.26 | length 18.6
  Top Layer w0.254: U2.26 66.9,77.824 66.554,77.478 66.554,64.906 68.584,62.875 U1.41
INLA: U1.38 U2.29 | length 16.6
  Top Layer w0.254: U2.29@69.3,79.46 69.3,78.298 67.916,76.914 67.916,65.478 69.012,64.382 69.493,64.382 U1.38
INLB: U1.40 U2.27 | length 18
  Top Layer w0.254: U2.27 67.7,77.982 67.008,77.29 67.008,65.094 68.726,63.375 U1.40
INLC: U1.42 U2.25 | length 19.2
  Top Layer w0.254: U2.25 66.1,64.718 68.442,62.375 U1.42
NetC11_1: C11.1 U1.5 | length 7.5
  Top Layer w0.254: U1.5@72.136,58.75 72.136,56.288 72.822,55.602 72.822,52.988 73.714,52.095 C11.1
NetC14_1: C14.1 U1.4 | length 11.1
  Top Layer w0.254: C14.1 71.598,48.898 72.158,48.898 72.352,49.092 72.352,55.43 71.65,56.132 U1.4
NetC14_2: C14.2 U1.3 | length 8.1
  Top Layer w0.254: 71.142,58.325 71.142,55.998 71.375,55.765 C14.2 ; 71.15,58.325 U1.3@71.15,58.552
NetC16_1: C16.1 D2.1 L1.1 U1.45
NetC16_2: C16.2 U1.44
NetD1_1: D1.1 R1.1 | length 2.2
  Top Layer w0.254: D1.1 64.607,94.006 65.179,94.578 R1.1@66.486,94.578
NetD1_2: D1.2 R2.1 | length 2.1
  Top Layer w0.254: D1.2 65.994,93.156 66.425,93.588 R2.1@66.435,93.588
NetD1_3: D1.3 R4.1 | length 3.7
  Top Layer w0.254: D1.3 63.157,93.156 63.881,92.432 66.423,92.432 R4.1@66.461,92.47
NetR6_1: R6.1 U1.28 | length 6.6
  Top Layer w0.254: R6.1 73.641,71.679 73.543,71.581 73.543,71.556 73.338,71.351 73.338,67.936 74.15,67.123 U1.28
NetR11_1: R11.1 R12.2 U1.1
OSC1: C1.2 U2.2 Y1.1 | length 6.5
  Top Layer w0.254: U2.2 73.077,81.635 74.224,81.635 Y1.1@76.572,79.287 ; Y1.1@76.775,79.385 77.075,79.385 77.548,78.912 77.548,78.529 77.925,78.152 C1.2@77.925,78.087
OSC2: C2.2 U2.3 Y1.3 | length 10.5
  Top Layer w0.254: U2.3 75.375,82.487 75.715,82.827 79.523,82.827 80.35,82 Y1.3@80.5,82 ; Y1.3@80.475,81.785 81.986,81.785 C2.2
Red: R1.2 U2.9 | length 13.3
  Top Layer w0.254: R1.2 67.217,94.659 68.513,94.659 v3(68.58,94.726) ; v3(70.105,86.231) 70.247,86.374 70.86,86.374 71.7,87.214 U2.9
  Bottom Layer w0.254: v3(68.58,94.726) 68.782,94.726 69.02,94.488 69.049,94.488 70.105,93.432 v3(70.105,86.231)
RsenseA: Q6.S R10.2 U1.11 | length 18.6
  Top Layer w0.254: U1.11@75.15,58.552 75.15,57.94 82.501,50.589 84.932,50.589 v1(84.96,50.616)
  Bottom Layer w0.254: v1(84.96,50.616) 85.081,50.495 v1(90.068,50.495)
RsenseB: Q5.S R9.2 U1.14 | length 15.8
  Top Layer w0.254: U1.14@76.473,59.875 76.726,59.875 78.774,57.827 78.774,57.395 v1(78.969,57.201)
  Bottom Layer w0.254: v1(78.969,57.201) 78.969,57.266 79.654,57.952 79.654,62.654 81.084,64.084 v1(85.242,64.084)
RsenseC: Q4.S R7.2 U1.21 | length 22.8
  Top Layer w0.254: U1.21 76.307,63.382 78.266,63.382 80.112,65.227 v1(80.112,65.253)
  Bottom Layer w0.254: v1(80.112,65.253) 80.256,65.397 83.897,65.397 88.25,69.75 88.25,73.391 87.833,73.808 v1(87.833,77.724)
RST: C3.2 R3.1 SW2.3 U2.4 | length 11.1
  Top Layer w0.254: U2.4@73.152,83.312 73.177,83.287 75.58,83.287 77.808,85.516 78.33,85.516 C3.2 ; C3.2@78.436,85.6 78.486,85.65 C3.2@78.486,85.725 ; C3.2@78.513,85.698 79.155,86.341 SW2.3 80.585,86.376 R3.1
SCLK: U1.31 U2.10 | length 29.6
  Top Layer w0.254: v1(70.739,74.422) 70.993,74.422 71.882,73.533 71.882,67.423 72.65,66.655 U1.31 ; U2.10 70.9,89.442 71.374,89.916 72.263,89.916 v1(72.39,90.043)
  Bottom Layer w0.254: v1(70.739,74.422) 70.774,74.422 71.616,75.265 71.616,76.8 71.504,76.912 71.504,85.093 72.39,85.979 v1(72.39,90.043)
SDI: U1.30 U2.12 | length 37.2
  Top Layer w0.254: U2.12 69.3,91.271 71.354,93.325 72.243,93.325 v1(72.39,93.472) ; v1(70.6,76.448) 70.618,76.448 72.396,74.67 72.396,67.551 73.143,66.804 73.143,65.532 U1.30
  Bottom Layer w0.254: v1(70.6,76.448) 70.612,76.46 70.612,85.217 71.374,85.979 71.374,92.456 v1(72.39,93.472)
SDO: R8.1 U1.29 U2.11 | length 34.8
  Top Layer w0.254: U2.11 70.1,90.42 71.501,91.821 v1(72.39,91.821) ; 72.898,72.695 R8.1 ; v1(73.635,73.939) 73.635,73.891 72.85,73.107 72.85,67.739 73.643,66.946 73.643,65.532 U1.29
  Bottom Layer w0.254: v1(72.39,91.821) 73.406,90.805 73.406,85.979 71.958,84.531 71.958,77.1 72.07,76.988 72.07,75.504 v1(73.635,73.939)
SWCLK: Designator5.3 U2.24 | length 7.3
  Top Layer w0.254: Designator5.3 62.198,76.448 62.198,78.698 64.157,80.657 64.157,80.761 64.396,81 U2.24@64.5,81
SWDIO: Designator5.2 U2.23 | length 7.7
  Top Layer w0.254: Designator5.2@59,77 63.687,81.687 U2.23
VCC: C5.1 C6.1 C7.1 C9.2 C10.2 C11.2 pad.7 Q1.D Q2.D Q3.D U1.6 U1.7 U1.47 U1.48 | length 15
  Top Layer w0.254: U1.7 73.151,58.724 73.151,57.371 78,52.522 C6.1@78,45.72
  other v1: 85,34 88,34 91,34 94,34 97,34 86.5,35.5 89.5,35.5 92.5,35.5 95.5,35.5 85,37 88,37 91,37 94,37 97,37 92,40.5 94.5,40.5 97,40.5 95.785,41.724 93.25,41.75 92,43 94.5,43 97,43 93.25,44.25 95.75,44.25 92,45.5 94.5,45.5 97,45.5 92,56 94.5,56 97,56 93.25,57.25 95.75,57.25 92,58.5 94.5,58.5 97,58.5 93.25,59.75 95.75,59.75 92,61 94.5,61 97,61 92,71 94.5,71 97,71 93.25,72.25 95.75,72.25 92,73.5 94.5,73.5 97,73.5 93.25,74.75 95.75,74.75 92,76 94.5,76 97,76
VCCSTM32: C8.2 C12.2 C13.2 C15.2 C17.2 C18.2 D1.4 Designator5.4 L1.2 R3.2 R6.2 R8.2 R11.2 SW1.1 U1.26 U2.1 U2.15 U2.17 | length 32.2
  Top Layer w0.254: v1@61.722,93.853 61.862,93.993 63.044,93.993 D1.4 ; C12.2@62.95,87.662 62.916,87.628 62.916,86.525 C13.2 64.749,86.512 U2.17 ; U2.15 66.882,87.83 66.882,89.537 66.95,89.606 66.95,90.174 67.099,90.322 v1(68.047,90.322) ; R8.2@74.243,72.695 74.927,72.695 75.438,72.183 v1(75.438,72.034) 75.438,70.29 75.15,70.002 ; C17.2@74.397,70.002 75.15,70.002 ; R6.2 74.514,71.777 74.905,71.777 75.163,72.034 v1@75.463,72.034 ; U1.26 75.15,70.002 ; v1(78.5,76) 78.605,76.105 80.931,76.105 SW1.1@81.031,76.205 ; R3.2@81.915,88.722 v1(83.287,88.722)
  Bottom Layer w0.254: v1(58.42,53.34) 58.614,53.146 58.614,52.336 59.95,51 v1(67.1,51)
  other v1: 53.34,53.34 55.88,53.34 53.34,55.88 55.88,55.88 53.34,58.42 55.88,58.42 53.34,60.96 74.93,78.867 64.525,87.087 61.849,93.98
pads on no net: J1.3 J1.4 SW1.2 SW1.3 SW2.1 SW2.2 U2.8 U2.19
copper on no net:
  other v4: 50,32.5 102.5,32.5 50,97.5 102.5,97.5

## Polygon pours and split planes (outlines as drawn)
VCC on Top Layer "NONET_L-01_P-001" (solid, pour order 16): 78.1,46 78.461,46 78.461,44.18 84.279,38.202 91.211,38.202 91.211,46.558 98.171,46.558 98.171,32.7 75.286,32.7 75.286,39.878 69.113,39.878 62.814,46.177 62.814,51.638 65.151,53.975 65.151,55.093 66.7,56.642 66.827,56.642 66.827,58.09 68.758,60.02 69.825,60.02 69.825,57.455 68.478,56.109 68.478,54.229 67.92,53.67 66.269,53.67 66.269,50.622 69.621,47.269 72.873,47.269 75.057,49.454 75.057,53.086 74.651,53.492 73.177,53.492 73.177,55.778 72.492,56.464 72.492,59.055 72.822,59.055 72.822,57.201 78.1,51.813
RsenseC on Top Layer "NONET_L-01_P-001" (solid, pour order 27): 84.379,75.921 84.404,75.895 89.51,75.895 91.567,77.953 92.126,77.953 93.142,77.953 93.142,79.299 91.77,80.67 86.157,80.67 84.379,78.892 84.379,77.978
GND on Top Layer "NONET_L-01_P-001" (solid, pour order 26): 88.036,70.434 86.852,69.25 82.22,69.25 82.22,75.565 90.25,75.565 90.25,73.588 88.062,71.399 88.062,71.323
GND on Top Layer "NONET_L-01_P-001" (solid, pour order 25): 82.122,55.5 81.483,56.075 81.483,57.25 81.483,62 90.018,62 90.018,59.284 88.417,59.284 87.528,58.395 87.528,55.5
GND on Top Layer "NONET_L-01_P-001" (solid, pour order 17): 84.7,38.3 80.5,42.5 80.5,45.965 90.052,45.965 91.258,44.759 91.166,38.3
GND on Top Layer "NONET_L-01_P-001" (solid, pour order 31): 75.1,39.7 69.1,39.7 62.7,46.1 62.7,51.8 69.791,58.891 69.791,60.688 61.917,60.688 56.606,66 50.2,66 50.2,32.7 75.1,32.7
VCCSTM32 on Top Layer "NONET_L-01_P-001" (solid, pour order 4): 72.187,81.157 72.187,79.607 72.946,79.607 74.346,78.207 75.58,78.207 75.58,79.407 73.83,81.157
A on Top Layer "NONET_L-01_P-001" (solid, pour order 10): 95.021,54.153 110.566,54.153 110.566,44.933 100,44.933 100,47.168 99.898,47.269 95.021,47.269
B on Top Layer "NONET_L-01_P-001" (solid, pour order 9): 94.945,69.329 94.945,62.442 99.99,62.442 99.99,60.096 110.525,60.096 110.525,69.302
C on Top Layer "NONET_L-01_P-001" (solid, pour order 7): 100,75.184 100,77.521 94.971,77.521 94.971,84.379 94.996,84.404 110.084,84.404 110.084,75.184
NetC16_2 on Top Layer "NONET_L-01_P-001" (solid, pour order 1): 66.309,63.49 66.299,63.5 63.683,66.118 62.259,66.118 62.259,65.229 64.723,62.765 66.577,62.765 68.101,61.241 69.803,61.241 69.803,61.495 68.304,61.495
GND on Top Layer "NONET_L-01_P-001" (solid, pour order 32): 67.843,49.149 69.596,47.396 70.612,47.396 70.612,50.216 71.374,50.978 71.374,59.08 70.206,59.08 69.799,58.674 69.799,52.324 68.758,52.324 67.843,51.41 67.843,49.962
VCCSTM32 on Top Layer "NONET_L-01_P-001" (solid, pour order 5): 60.23,51.877 60.23,58.643 56.18,62.693 51.58,62.693 51.58,51.908
GND on Top Layer "NONET_L-01_P-001" (solid, pour order 30): 74.473,65.202 74.803,65.202 74.803,69.52 73.711,69.52 73.711,67.993 74.473,67.193
VCC on Top Layer "NONET_L-01_P-001" (solid, pour order 28): 89.814,70.536 89.814,72.847 91.897,72.847 91.897,70.536
RsenseB on Top Layer "NONET_L-01_P-001" (solid, pour order 23): 93.116,63.144 93.116,64.262 90.754,66.624 86.258,66.624 83.896,64.262 83.896,63.144
VCC on Top Layer "NONET_L-01_P-001" (solid, pour order 18): 89.56,56.388 89.56,58.75 92.05,58.75 92.1,58.75 92.1,56.388
RsenseA on Top Layer "NONET_L-01_P-001" (solid, pour order 21): 87,49.9 88.203,49.9 89.611,51.308 93.37,51.308 93.37,47.904 90.399,47.904 89.789,47.295 87,47.295
NetR11_1 on Top Layer "NONET_L-01_P-001" (solid, pour order 3): 66.575,52.475 67.575,52.475 67.88,52.7 69.65,52.7 69.65,53.5 69.525,53.5 69.525,56.2 70.275,56.95 70.275,59.025 69.975,59.025 69.975,57.25 68.675,55.95 68.675,53.95 68.087,53.362 66.575,53.362
NetC16_1 on Top Layer "NONET_L-01_P-001" (solid, pour order 0): 69.803,60.987 69.803,60.733 62.081,60.733 58.132,64.683 59.574,66.125 61.827,66.125 61.827,65.203 64.57,62.46 66.501,62.46 67.974,60.987
VCCSTM32 on Layer 2 "NONET_L-01_P-001" (solid, pour order 12): 85,42.836 74.664,32.5 50,32.5 50,97.5 85,97.5
VCC on Layer 2 "NONET_L-01_P-001" (solid, pour order 33): 87.5,42.745 82.982,38.227 77.255,32.5 102.5,32.5 102.5,97.5 87.5,97.5
VCC on Bottom Layer "NONET_L-01_P-001" (solid, pour order 13): 91.058,38.227 84,38.227 84,33 84.339,32.661 91.054,32.69 98.4,32.69 98.4,77.5 91.085,77.5
GND on Layer 1 "NONET_L-01_P-001" (solid, pour order 11): 49.98,97.5 102.5,97.5 102.5,32.5 49.98,32.5

## Silkscreen, mask and mechanical layers (free items; w line width, h text height)
Top Overlay:
  drawing of 11 lines, arcs and shapes, not listed
  text "C" at 102.972,78.994 h1.52
  text "GND" at 51.25,77.25 h1
  text "SWDIO" at 52.7,75.7 h1
  text "SWCLK" at 54.2,73.95 h1
  text "VCC" at 57.75,71.5 h1
  text "B" at 102.768,64.033 h1.52
  text "A" at 103.327,49.352 h1.52
  text "-" at 66.054,34.892 h1.52
  text "+" at 83.354,34.9 h1.52
  text "C.A." at 50.102,34.722 h2.5
Mechanical 1:
  the board outline again, w0.254